# Altium PCB LEDRing2.PcbDoc
Units mil, origin at the board's own origin, x right, y up, seen from the top; angles counter-clockwise.
Board outline 6000 x 4000 mil, 2 copper layers (Top Layer, Bottom Layer); 25 components, 20 nets, 99 pads, 0 vias.
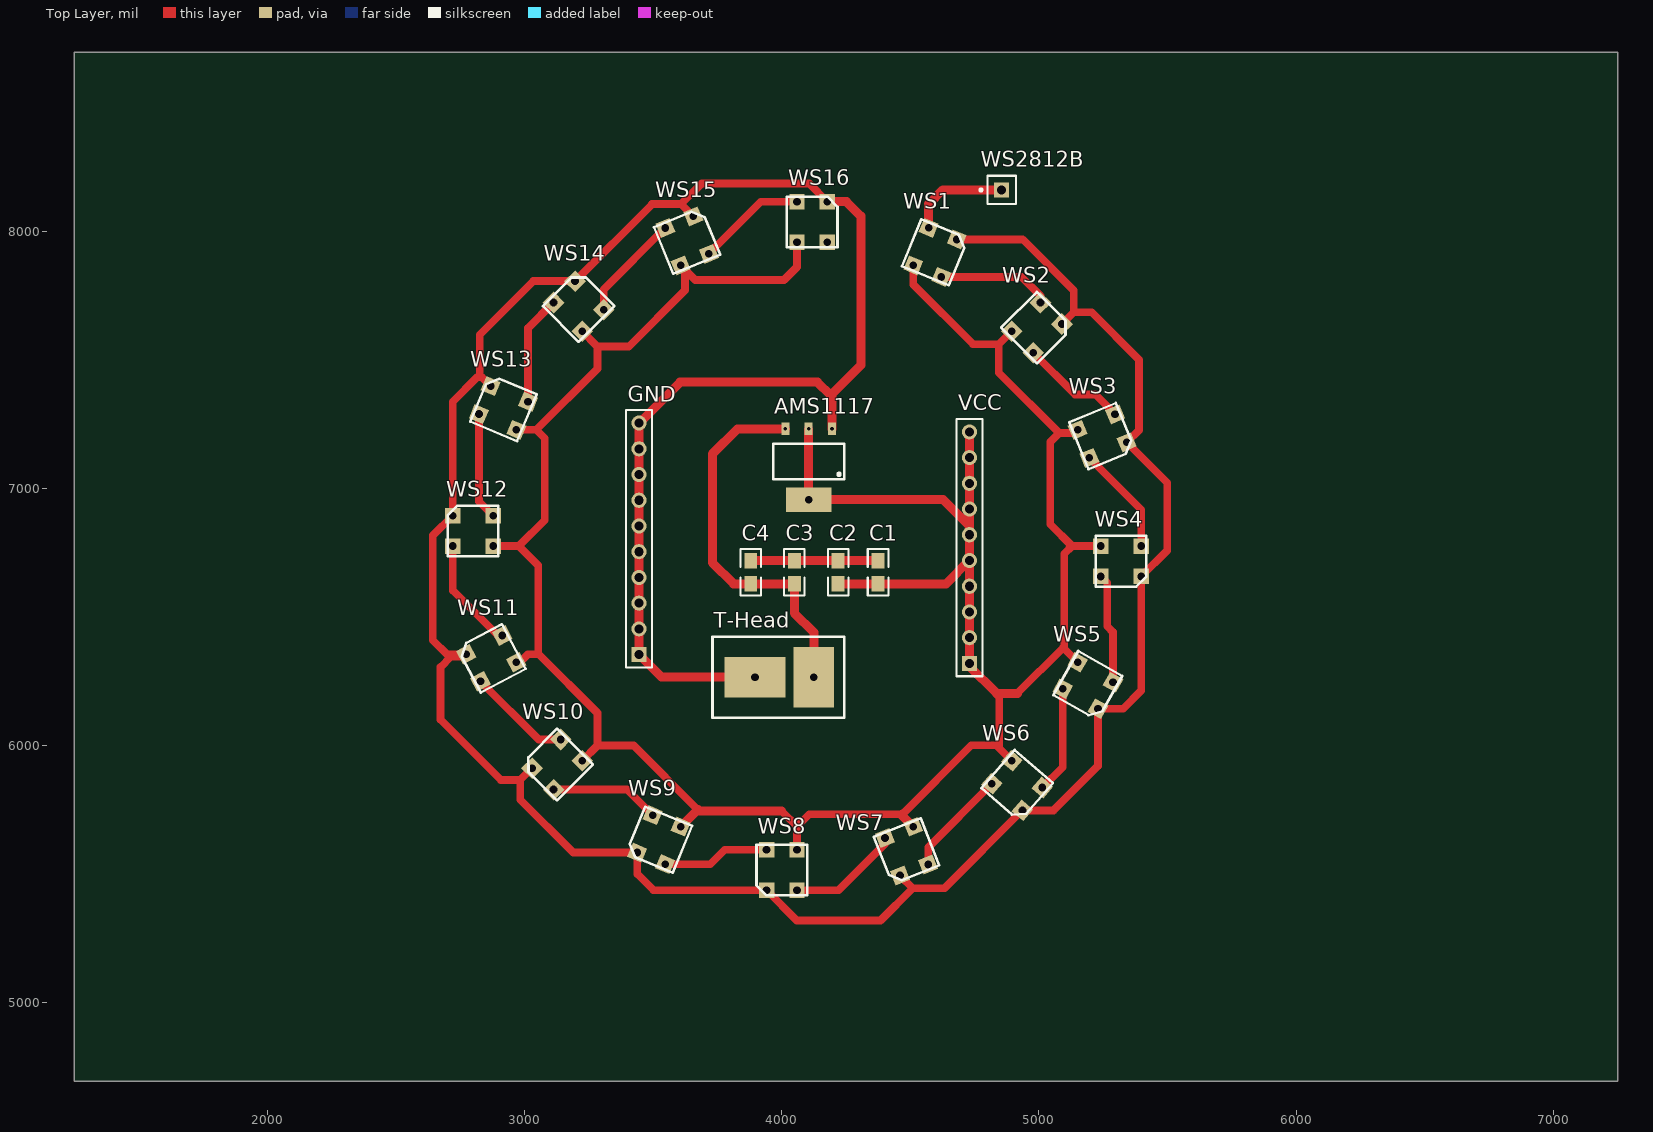
[diagram p0: Top Layer view]
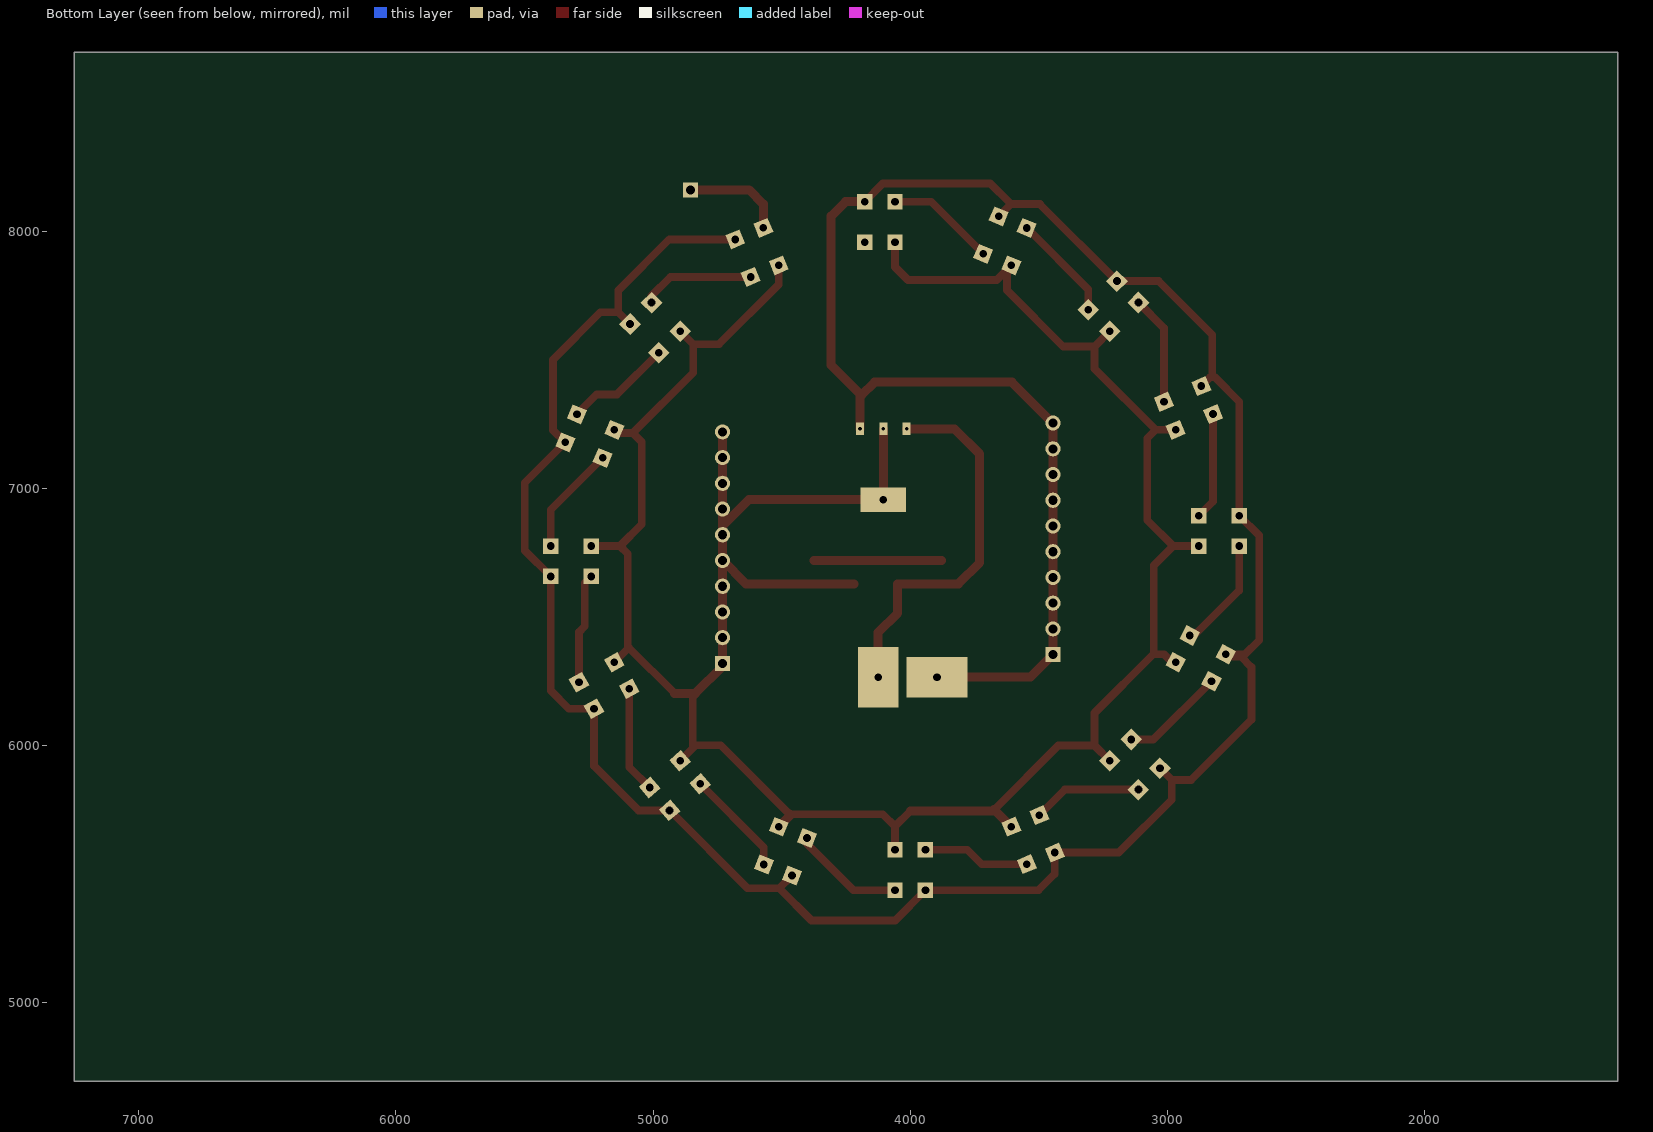
[diagram p1: Bottom Layer view, seen from below]

## Layer stack, top to bottom
Top Solder: solder mask 0.4, Solder Resist, Dk 3.5
Top Layer: signal copper 1.4
Dielectric 1: dielectric 12.6, FR-4, Dk 4.8
Bottom Layer: signal copper 1.4
Bottom Solder: solder mask 0.4, Solder Resist, Dk 3.5

## Board outline
1250,4695 7250,4695 7250,8695 1250,8695

## Design rules (kind name [scope] priority, off if disabled: settings)
Clearance [All] p1: gap=10 ignorepadtopadclearanceinfootprint=FALSE except(0: Arc-Hole Track-Hole SMDPad-Hole THPad-Hole Via-Hole Fill-Hole Poly-Hole Region-Hole Text-Hole)
PolygonConnect [All] p1: connectstyle=Relief reliefconductorwidth=10 reliefentries=4 polygonreliefangle="90 Angle" airgapwidth=10
RoutingVias [All] p1: holewidth=28 width=50 viastyle="Through Hole" minholewidth=28 minwidth=50 maxholewidth=28 maxwidth=50
SolderMaskExpansion [All] p1: expansion=4
Width [All] p1: maxlimit=40 minlimit=10 preferedwidth=35
30 further rules are at their usual default settings.

## Components (designator, comment, footprint, x,y, rotation, side; value= is the part's Value field where it differs from the comment)
AMS1117 "AMS1117" AMS1117-3.3 4104.75,7113.38 r180 top
C1 "220uF" 0805 4374.48,6718.43 r270 top
C2 "104" 0805 4219.48,6718.43 r270 top
C3 "104" 0805 4049.47,6718.43 r270 top
C4 "220uF" 0805 3879.47,6718.43 r270 top
GND "CON10" HDR1X10 3445.36,6353.53 r90 top
T-Head "T-Head" T_head 4124.73,6265.6 r180 top
VCC "CON10" HDR1X10 4729.89,6319.37 r90 top
WS1 "WS2812B" WS2812B 4511.45,7866.73 r337.68 top
WS2 "WS2812B" WS2812B 4894.63,7610.7 r315 top
WS3 "WS2812B" WS2812B 5150.66,7227.52 r292.5 top
WS4 "WS2812B" WS2812B 5240.57,6775.53 r270 top
WS5 "WS2812B" WS2812B 5150.66,6323.55 r240.44 top
WS6 "WS2812B" WS2812B 4894.63,5940.37 r228.92 top
WS7 "WS2812B" WS2812B 4511.45,5684.34 r201.6 top
WS8 "WS2812B" WS2812B 4059.47,5594.43 r180 top
WS9 "WS2812B" WS2812B 3607.48,5684.34 r157.5 top
WS10 "WS2812B" WS2812B 3224.3,5940.37 r135.15 top
WS11 "WS2812B" WS2812B 2968.27,6323.55 r117.72 top
WS12 "WS2812B" WS2812B 2878.36,6775.53 r90 top
WS13 "WS2812B" WS2812B 2968.27,7227.52 r67.22 top
WS14 "WS2812B" WS2812B 3224.3,7610.7 r44.95 top
WS15 "WS2812B" WS2812B 3607.48,7866.73 r22.44 top
WS16 "WS2812B" WS2812B 4059.47,7956.64 r0 top
WS2812B "CON1" PIN1 4855,8160 r90 top

## Footprints (in the part's own frame and the unit in brackets; to place one, negate y for a bottom-side part, rotate by r counter-clockwise, add the part's x,y. Pads: shape width x height; smd on the part's side, far side on the other; paste and mask are expansions set on the pad)
0805 [mil]
  rect 60x50 smd: 1(0,0) 2(90,0)
  silkscreen extent -45,-40 135,40
AMS1117-3.3 [mm]
  rect 0.8x1.2 hole 0.362: 1(-2.3,-3) 2(0,-3) 3(2.3,-3)
  rect 4.5x2.4 hole 0.762: 2(0,4)
  silkscreen extent -3.5,-1.5 3.5,2
HDR1X10 [mm] "Connector; Header; 10 Position"
  rect 1.5x1.5 hole 0.9: 1(0,0)
  round 1.5 hole 0.9: 2(2.54,0) 3(5.08,0) 4(7.62,0) 5(10.16,0) 6(12.7,0) 7(15.24,0) 8(17.78,0) 9(20.32,0) 10(22.86,0)
  silkscreen extent -1.27,-1.27 24.13,1.27
PIN1 [mm] "Connector; Plug"
  rect 1.5x1.5 hole 0.9: 1(0,0)
  silkscreen extent -1.4,-1.4 1.4,2.17
T_head [mm]
  rect 4x6 hole 0.762: 1(0,0)
  rect 6x4 hole 0.762: 2(5.8,0)
  silkscreen extent -3,-4 10,4
WS2812B [mil]
  rect 60x60 hole 30: 1(0,0) 2(118.11,0) 3(118.11,157.48) 4(0,157.48)
  silkscreen extent -39,-20 157,177

## Part data
C1 C2 C3 C4: library part C
WS1 WS2 WS3 WS4 WS5 WS6 WS7 WS8 WS9 WS10 WS11 WS12 WS13 WS14 WS15 WS16: library part Component_1

## Nets (pads, with @x,y where several pads share a name; then routed paths per layer and width w, separated by ;. In a path a pad name is that pad's centre, name@x,y a point inside that pad or via, vN(x,y) a via of type N, cw(c..) or ccw(c..) an arc to the next point about the centre after c; other vN are vias at no path point)
GND: AMS1117.1 GND.1 GND.2 GND.3 GND.4 GND.5 GND.6 GND.7 GND.8 GND.9 GND.10 T-Head.2 WS1.3 WS2.3 WS3.3 WS4.3 WS5.3 WS6.3 WS7.3 WS8.3 WS9.3 WS10.3 WS11.3 WS12.3 WS13.3 WS14.3 WS15.3 WS16.3 | length 12959.3
  Top Layer w30: WS13.3 2834.56,7431.62 ; WS10.3 2983.93,5866.43 ; WS15.3 3613.93,8099.97 3613.93,8110.03 ; WS16.3 4106.69,8185 3688.9,8185 3613.93,8110.03 ; WS7.3 4509.05,5445 ; WS1.3 4936.36,7967.57 5134.95,7768.98 5134.95,7683.98 ; WS2.3 5134.95,7683.98 ; 2834.56,7431.62 2825.79,7440.39 2825.79,7596.86 3034.53,7805.59 WS14.3 3496.03,8105 3608.9,8105 3613.93,8110.03 ; 2834.56,7431.62 2815.56,7431.62 2720.88,7336.95 WS12.3 2643.93,6816.69 2643.93,6410 2699.08,6354.85 WS11.3 2764.07,6345 2713.93,6345 2673.93,6305 2673.93,6100 2907.5,5866.43 2983.93,5866.43 ; 2983.93,5866.43 2983.93,5790 3189.89,5584.04 WS9.3 3438.09,5500.84 3501.98,5436.95 WS8.3 4058.31,5320 4384.05,5320 4509.05,5445 ; 4509.05,5445 4632.88,5445 WS6.3 5056.79,5747.86 5229.38,5920.45 WS5.3 5327.05,6143.12 5398.05,6214.12 WS4.3 5498.93,6758.31 5498.93,7021.09 WS3.3 5388.93,7226.25 5388.93,7500 5204.95,7683.98 5134.95,7683.98
  Top Layer w35: T-Head.2 3533.3,6265.6 GND.1 GND.2 GND.3 GND.4 GND.5 GND.6 GND.7 GND.8 GND.9 GND.10 3604.95,7413.11 4139,7413.11 4190.39,7361.72 ; WS16.3 4251.52,8114.12 4307.42,8058.22 4307.42,7478.75 4190.39,7361.72 ; 4188.96,7360.29 4190.39,7361.72 ; AMS1117.1 4195.3,7356.8 4190.39,7361.72
NetAMS1117_3: AMS1117.3 C3.2 C4.2 T-Head.1 | length 1493.3
  Top Layer w35: AMS1117.3 3828.94,7231.49 3730.81,7133.36 3730.81,6710.88 3813.27,6628.43 C4.2 C3.2 4049.47,6514.98 4124.73,6439.72 T-Head.1
NetC1_1: C1.1 C2.1 C3.1 C4.1 | length 495
  Top Layer w35: C4.1 C3.1 C2.1 C1.1
NetWS1_2: WS1.2 WS2.4 | length 441.8
  Top Layer w30: WS1.2 4932.05,7821.88 5005.99,7747.94 WS2.4
NetWS1_4: WS1.4 WS2812B.1 | length 399.2
  Top Layer w35: WS1.4 4571.25,8105.11 4626.15,8160 WS2812B.1
NetWS2_2: WS2.2 WS3.4 | length 417.2
  Top Layer w30: WS2.2 5140.33,7365 5218.94,7365 WS3.4
NetWS3_2: WS3.2 WS4.4 | length 426.6
  Top Layer w30: WS3.2 5398.05,6916.21 WS4.4
NetWS4_2: WS4.2 WS5.4 | length 431.1
  Top Layer w30: WS4.2 5265.57,6632.42 5265.57,6463.52 5287.65,6441.44 WS5.4
NetWS5_2: WS5.2 WS6.4 | length 416.7
  Top Layer w30: WS6.4 5092.4,5915.94 WS5.2
NetWS6_2: WS6.2 WS7.4 | length 416
  Top Layer w30: WS7.4 4569.43,5603.74 WS6.2
NetWS7_2: WS7.2 WS8.4 | length 440.2
  Top Layer w30: WS8.4 4220.88,5436.95 4401.64,5617.71 WS7.2
NetWS8_2: WS8.2 WS9.4 | length 417.2
  Top Layer w30: WS9.4 3722.78,5538.85 3778.36,5594.43 WS8.2
NetWS9_2: WS9.2 WS10.4 | length 426.2
  Top Layer w30: WS10.4 3399.18,5828.71 WS9.2
NetWS10_2: WS10.2 WS11.4 | length 405.6
  Top Layer w30: WS11.4 3055.5,6023.66 WS10.2
NetWS11_2: WS11.2 WS12.4 | length 437.4
  Top Layer w30: WS12.4 2720.88,6603.05 2895.83,6428.1 WS11.2
NetWS12_2: WS12.2 WS13.4 | length 417.7
  Top Layer w30: WS13.4 2823.07,6948.94 WS12.2
NetWS13_2: WS13.2 WS14.4 | length 426.8
  Top Layer w30: WS13.2 3014,7623.1 WS14.4
NetWS14_2: WS14.2 WS15.4 | length 417.3
  Top Layer w30: WS14.2 3307.89,7772.81 WS15.4
NetWS15_2: WS15.2 WS16.4 | length 426.6
  Top Layer w30: WS15.2 3918.94,8114.12 WS16.4
VCC: AMS1117.2 C1.2 C2.2 VCC.1 VCC.2 VCC.3 VCC.4 VCC.5 VCC.6 VCC.7 VCC.8 VCC.9 VCC.10 WS1.1 WS2.1 WS3.1 WS4.1 WS5.1 WS6.1 WS7.1 WS8.1 WS9.1 WS10.1 WS11.1 WS12.1 WS13.1 WS14.1 WS15.1 WS16.1 | length 10824.7
  Top Layer w10: WS11.1 WS11.1@2982.48,6323.55
  Top Layer w30: WS12.1 2978.4,6775.53 ; WS13.1 3046.41,7227.52 ; WS11.1@2982.48,6323.55 3013.93,6355 3053.93,6355 ; WS10.1 3283.93,6000 ; WS14.1 3283.93,7551.07 ; WS15.1 WS15.1@3623.93,7850.28 ; 3673.84,5750.7 3424.54,6000 3283.93,6000 ; 4000.05,5744.95 4059.47,5685.53 ; WS8.1 4059.47,5685.53 ; WS16.1 4059.47,7860.53 4008.93,7810 3664.21,7810 WS15.1@3623.93,7850.28 ; WS1.1 4511.45,7792.48 4743.93,7560 4843.93,7560 ; 4845.57,6191.97 4845.57,6001.07 4833.93,6001.07 ; WS6.1 4833.93,6001.07 ; WS2.1 4843.93,7560 ; 4916.49,6202.84 5093.93,6380.28 ; WS5.1 5096.43,6377.78 5098.93,6380.28 5098.93,6746.07 5128.4,6775.53 ; WS3.1 5138.14,7215 5078.93,7215 ; WS4.1 5128.4,6775.53 ; 2978.4,6775.53 3078.93,6876.07 3078.93,7195 3046.41,7227.52 ; 2978.4,6775.53 3053.93,6700 3053.93,6355 ; 3046.41,7227.52 3283.93,7465.04 3283.93,7551.07 ; 3053.93,6355 3055.42,6355 3283.93,6126.49 3283.93,6000 ; 3283.93,7551.07 3405,7551.07 3623.93,7770 WS15.1@3623.93,7850.28 ; 4059.47,5685.53 4107.16,5733.23 4469.76,5733.23 4737.6,6001.07 4833.93,6001.07 ; 4843.93,7560 4843.93,7450 5078.93,7215 ; 5078.93,7215 5043.93,7180 5043.93,6860 5128.4,6775.53
  Top Layer w35: WS9.1 3668.09,5744.95 ; 3673.84,5750.7 3668.09,5744.95 ; 4000.05,5744.95 3668.09,5744.95 ; AMS1117.2@4104.75,7231.49 4104.75,6955.9 4627.61,6955.9 4729.89,6853.62 ; C2.2 C1.2 4638.85,6628.43 VCC.5@4729.89,6719.46 ; 4469.76,5733.23 4469.76,5726.03 WS7.1 ; VCC.10 VCC.9 VCC.8 VCC.7 4729.89,6853.62 ; 4845.57,6191.97 4836.9,6200.63 4846.41,6200.63 4846.41,6202.84 ; 4916.49,6202.84 4846.41,6202.84 ; VCC.5@4729.89,6719.46 VCC.6 4729.89,6853.62 ; VCC.5@4729.89,6719.46 VCC.5 VCC.4 VCC.3 VCC.2 VCC.1 4729.89,6308.86 4835.91,6202.84 4846.41,6202.84
pads on no net: WS16.2